# Altium PCB wristband5.PcbDoc
Units mm, origin at the board's own origin, x right, y up, seen from the top; angles counter-clockwise.
Board outline 43 x 44.5 mm, 2 copper layers (Top Layer, Bottom Layer); 15 components, 24 nets, 85 pads, 0 vias.
Unrouted connection lines stored in the file: 42.
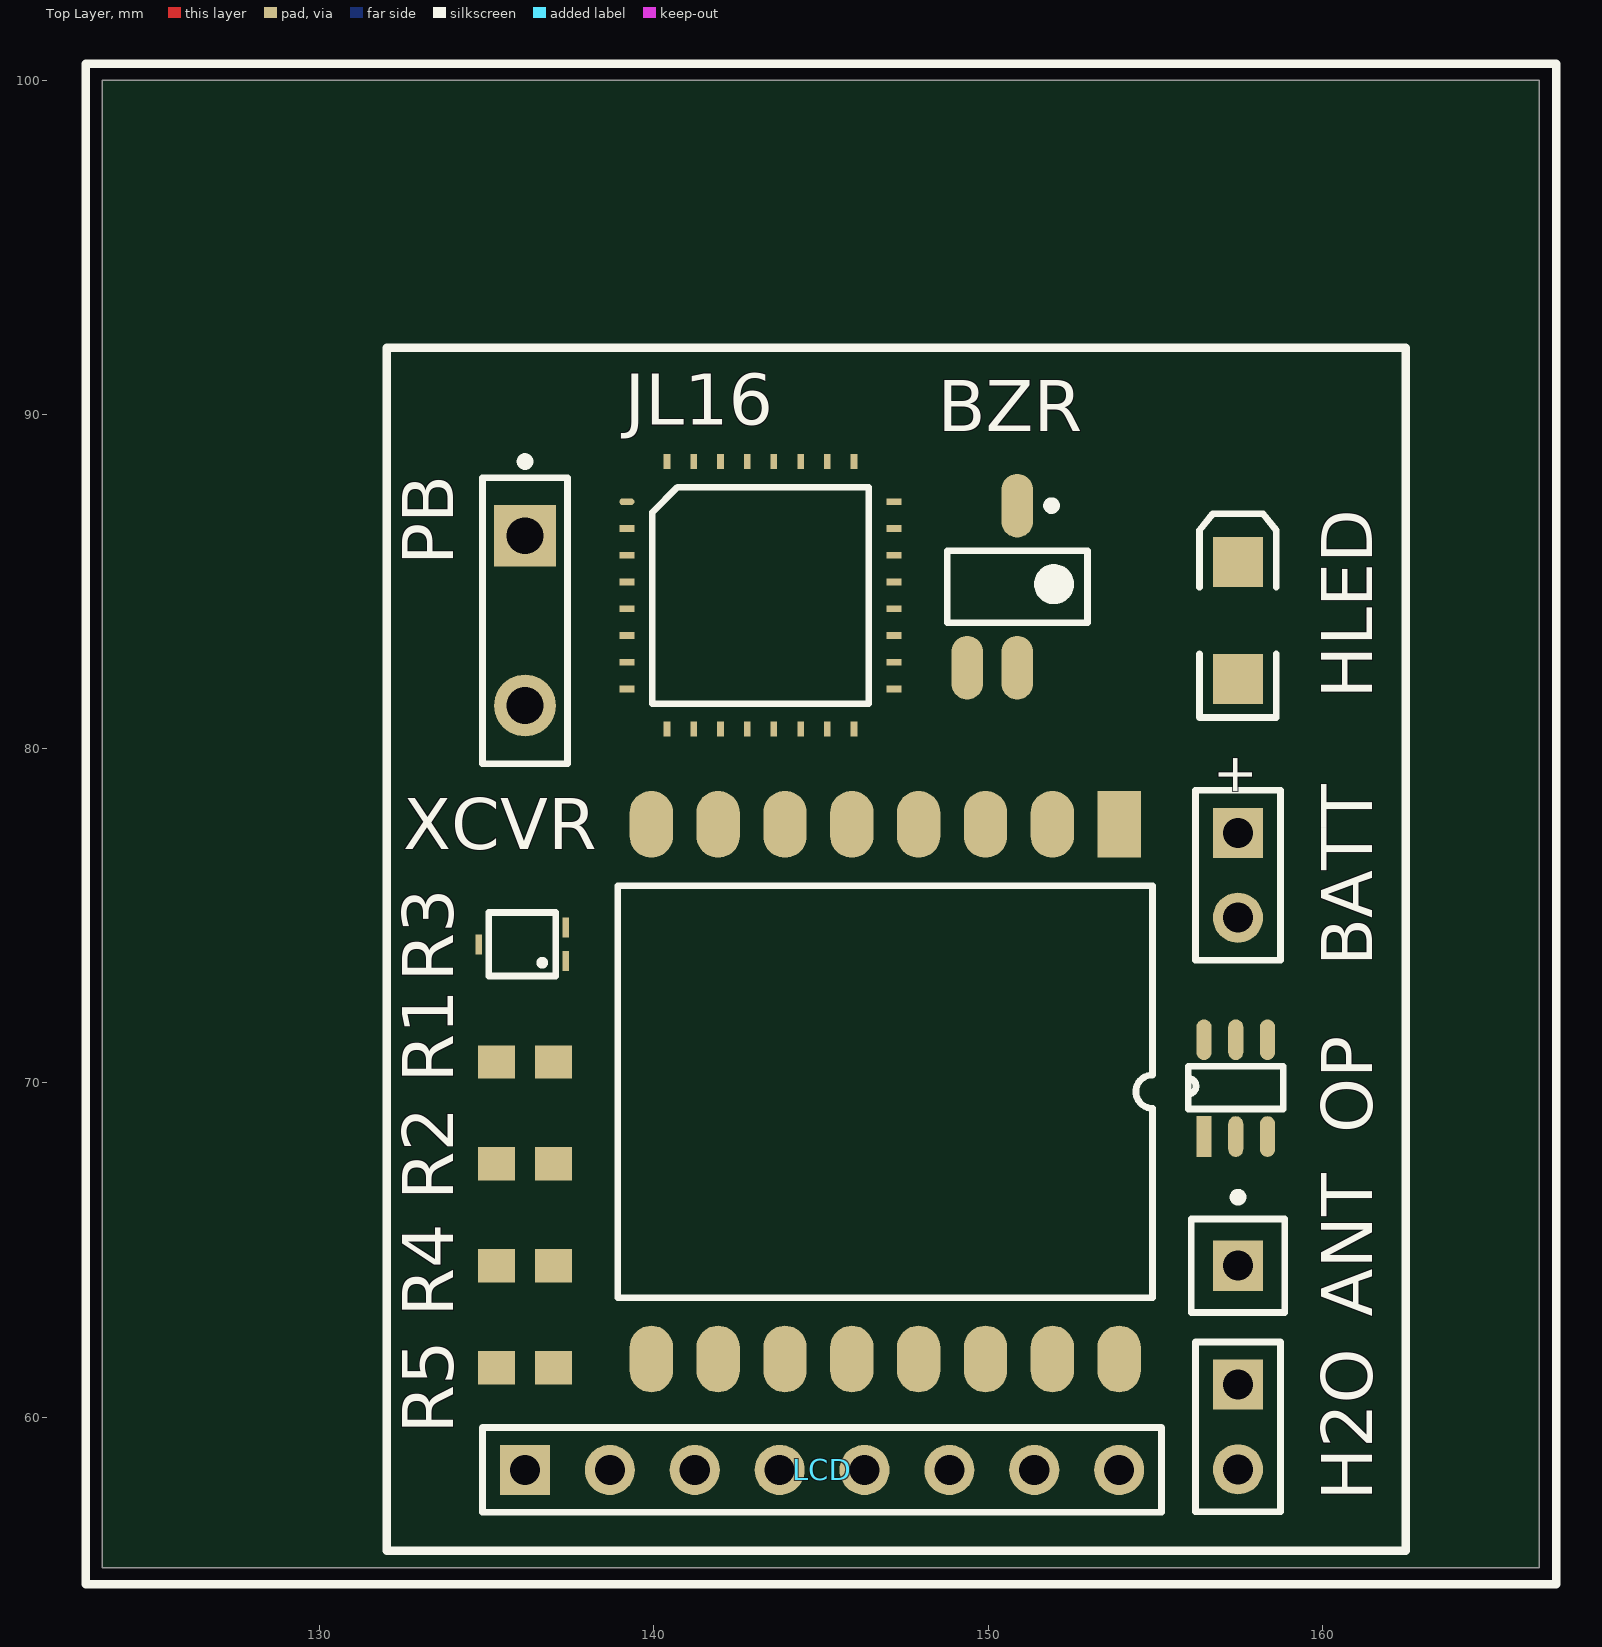
[diagram p0: Top Layer view]
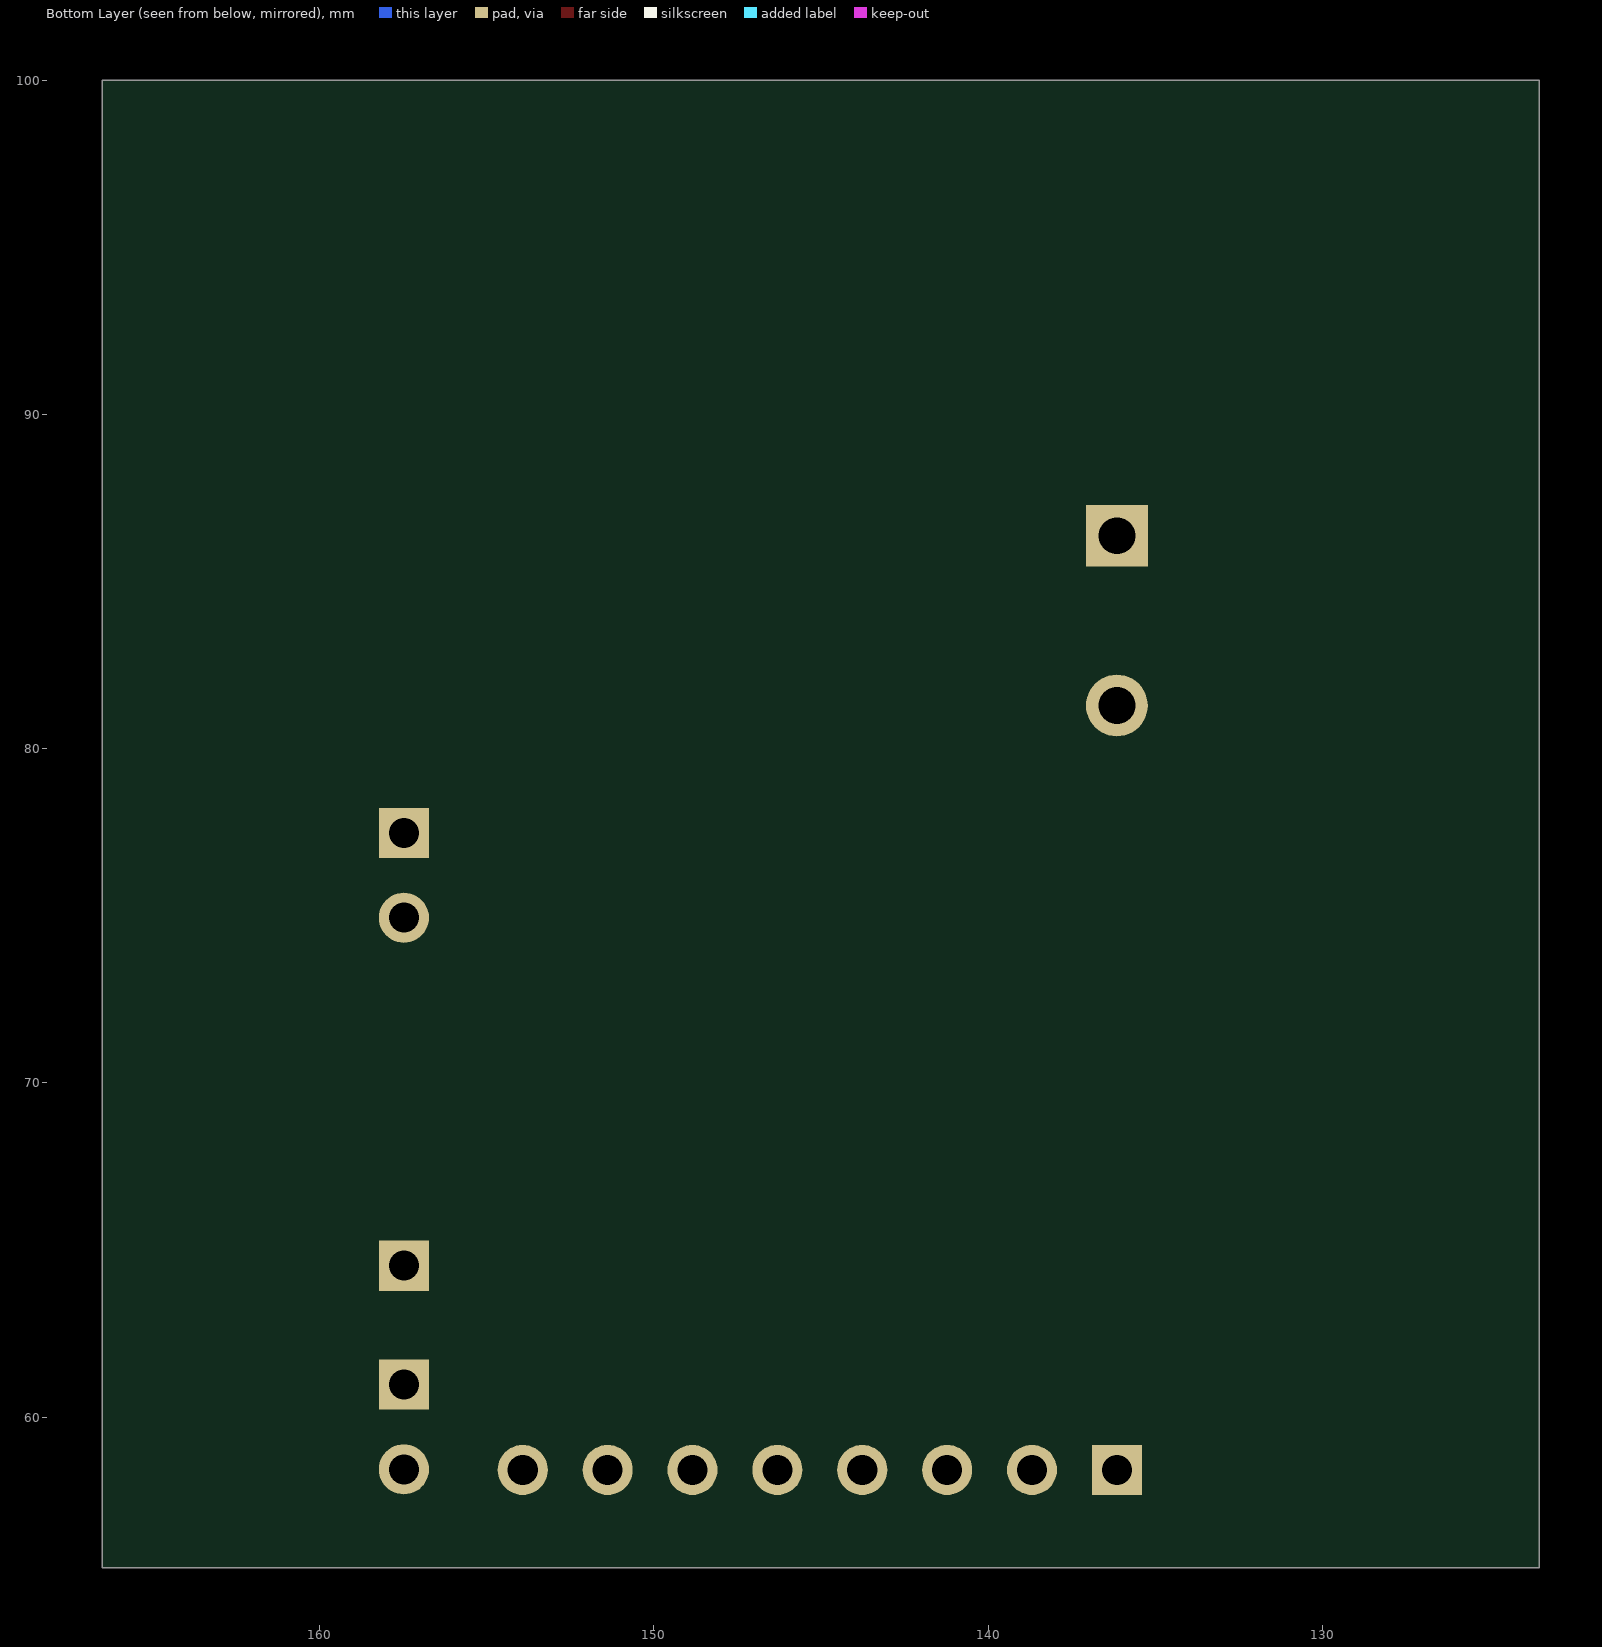
[diagram p1: Bottom Layer view, seen from below]

## Layer stack, top to bottom
Top Layer: signal copper 0.0356
Dielectric: dielectric 0.32, FR-4, Dk 4.8
Bottom Layer: signal copper 0.0356

## Board outline
123.5,100 123.5,55.5 166.5,55.5 166.5,100 123.5,100

## Design rules (kind name [scope] priority, off if disabled: settings)
Clearance [All] p1: gap=0.254
PolygonConnect [All] p1: connectstyle=Relief reliefconductorwidth=0.254 reliefentries=4 polygonreliefangle="90 Angle"
RoutingVias [All] p1: holewidth=0.711 width=1.27 viastyle="Through Hole" minholewidth=0.711 minwidth=1.27 maxholewidth=0.711 maxwidth=1.27
SilkscreenOverComponentPads [All] p1: minsilkscreentomaskgap=0.254
SolderMaskExpansion [All] p1: expansion=0.102
TestPointUsage [All] p1: valid=0 allowmultiple=FALSE
Testpoint [All] p1: side=15 testpointundercomponent=TRUE minsize=1.016 maxsize=2.54 preferedsize=1.524 minholesize=0 maxholesize=1.016 preferedholesize=0.813 testpointgrid=0.025 style=1023 order=0-112345678
Width [All] p1: maxlimit=0.254 minlimit=0.254 preferedwidth=0.254
23 further rules are at their usual default settings.

## Components (designator, comment, footprint, x,y, rotation, side; value= is the part's Value field where it differs from the comment)
ANT "Antenna" PIN1 157.48,64.532 r0 top
BATT "Battery" BAT-2 157.48,76.216 r270 top
BZR "BUZZER" BUZZER_SOJ 150.876,84.852 r270 top
H2O "Header 2" HDR1X2 157.48,60.976 r270 top
HLED "LED2" 3.2X1.6X1.1 157.48,83.836 r90 top
JL16 "JL16" JL16_QUAD32 139.192,87.392 r0 top
LCD "LCD_3D" LCD 136.144,58.42 r0 top
OP "OPAMP" OPAMP_SOP6 156.464,68.596 r90 top
PB "SW-PB" SPST-2 136.144,83.836 r270 top
R1 "Res3" J1-0603 136.144,70.628 r0 top
R2 "Res3" J1-0603 136.144,67.58 r180 top
R3 "RPot" POT 137.16,75.2 r180 top
R4 "Res3" J1-0603 136.144,64.532 r0 top
R5 "Res3" J1-0603 136.144,61.484 r0 top
XCVR "XCVR" XCVR_SOP16 153.924,77.74 r270 top

## Footprints (in the part's own frame and the unit in brackets; to place one, negate y for a bottom-side part, rotate by r counter-clockwise, add the part's x,y. Pads: shape width x height; smd on the part's side, far side on the other; paste and mask are expansions set on the pad)
3.2X1.6X1.1 [mm] "SMT LED; 2 Flat Leads"
  rect 1.5x1.5 smd: 1(-1.75,0) 2(1.75,0)
  silkscreen extent -2.9,-1.15 3.2,1.15
BAT-2 [mm] "Multicell Battery; 2 Leads"
  rect 1.5x1.5 hole 0.9: 1(-1.27,0)
  round 1.5 hole 0.9: 2(1.27,0)
  silkscreen extent -2.54,-1.27 2.54,1.27
BUZZER_SOJ [mm] "SOJ, 3-Leads, Body 4.2x5.5mm (max), Pitch 1.50mm, IPC Low Density"
  oval 1.9x0.95 smd: 1(-2.425,0) 2(2.425,-1.5) 3(2.425,0)
  silkscreen extent -2.55,-2.1 1.07,2.1, body extent -2.75,-2.1 2.75,2.1, height 2.12
HDR1X2 [mm] "Connector; Header; 2 Position"
  rect 1.5x1.5 hole 0.9: 1(0,0)
  round 1.5 hole 0.9: 2(2.54,0)
  silkscreen extent -1.27,-1.27 3.81,1.27
J1-0603 [mm] "Chip Resistor; Body 1.6 x 0.8 mm (LxW typ)"
  rect 1.1x1 smd: 1(-0.85,0) 2(0.85,0)
JL16_QUAD32 [mm]
  oval 0.45x0.2 smd: 1(0,0)
  rect 0.45x0.2 smd: 2(0,-0.8) 3(0,-1.6) 4(0,-2.4) 5(0,-3.2) 6(0,-4) 7(0,-4.8) 8(0,-5.6) 17(8,-5.6) 18(8,-4.8) 19(8,-4) 20(8,-3.2) 21(8,-2.4) 22(8,-1.6) 23(8,-0.8) 24(8,0)
  rect 0.2x0.45 smd: 9(1.2,-6.8) 10(2,-6.8) 11(2.8,-6.8) 12(3.6,-6.8) 13(4.4,-6.8) 14(5.2,-6.8) 15(6,-6.8) 16(6.8,-6.8) 25(6.8,1.2) 26(6,1.2) 27(5.2,1.2) 28(4.4,1.2) 29(3.6,1.2) 30(2.8,1.2) 31(2,1.2) 32(1.2,1.2)
  silkscreen extent 0.76,-6.04 7.24,0.44, body extent 0.3,-6.5 7.7,0.9, height 1.6
LCD [mm] "Connector; Header; 8 Position"
  rect 1.5x1.5 hole 0.9: 1(0,0)
  round 1.5 hole 0.9: 2(2.54,0) 3(5.08,0) 4(7.62,0) 5(10.16,0) 6(12.7,0) 7(15.24,0) 8(17.78,0)
  silkscreen extent -1.27,-1.27 19.05,1.27, body extent -13,-3 31,42, height 3.01
OPAMP_SOP6 [mm]
  rect 1.22x0.45 smd: 1(-0.2,0)
  oval 1.22x0.45 smd: 2(-0.2,-0.95) 3(-0.2,-1.9) 4(2.7,-1.9) 5(2.7,-0.95) 6(2.7,0)
  silkscreen extent 0.62,-2.38 1.9,0.48, body extent 0.5,-2.5 2,0.6, height 1
PIN1 [mm] "Generic Antenna; 1 Lead"
  rect 1.5x1.5 hole 0.9: 1(0,0)
  silkscreen extent -1.4,-1.4 1.4,2.17
POT [mm] "490-2034-2-ND"
  rect 0.2x0.6 smd: 1(-0.2,1.55) 2(-0.2,0.55) 3(2.4,1.05)
  silkscreen extent 0.1,0.09 2.1,2, body extent -0.2,0 2.4,2.1, height 0.8
SPST-2 [mm] "Circuit Breaker; 2 Leads"
  rect 1.85x1.85 hole 1.1: 1(-2.54,0)
  round 1.85 hole 1.1: 2(2.54,0)
  silkscreen extent -4.89,-1.27 4.28,1.27
XCVR_SOP16 [mm]
  rect 2x1.3 smd: 1(0,0)
  oval 2x1.3 smd: 2(0,-2) 3(0,-4) 4(0,-6) 5(0,-8) 6(0,-10) 7(0,-12) 8(0,-14) 9(16,-14) 10(16,-12) 11(16,-10) 12(16,-8) 13(16,-6) 14(16,-4) 15(16,-2) 16(16,0)
  silkscreen extent 1.83,-15 14.17,1, body extent 1,-15 15,1, height 1.8

## Part data
ANT: "Generic Antenna"
BATT: "Multicell Battery"
H2O: "Header, 2-Pin"
HLED: "Typical RED, GREEN, YELLOW, AMBER GaAs LED"
JL16: "Freescale MC908JL16"
OP: "LT6230CS6"
PB: "Switch"
R1 R2 R4 R5: "Resistor"
R3: "Potentiometer"
XCVR: "RFM22B"

## Nets (pads, with @x,y where several pads share a name; then routed paths per layer and width w, separated by ;. In a path a pad name is that pad's centre, name@x,y a point inside that pad or via, vN(x,y) a via of type N, cw(c..) or ccw(c..) an arc to the next point about the centre after c; other vN are vias at no path point)
3.3V: BATT.1 BZR.1 H2O.1 JL16.7 LCD.1 OP.6 R3.2 R4.2 XCVR.11
DC: JL16.18 LCD.5
DN: JL16.17 LCD.6
GND: BATT.2 JL16.3 LCD.2 OP.2 OP.4 OP.5 PB.1 R1.1 R2.1 R2.2 R3.1 XCVR.12
LED: LCD.8 R5.1
NetANT_1: ANT.1 XCVR.14
NetBZR_3: BZR.3 JL16.8
NetH2O_2: H2O.2 R1.2
NetHLED_1: HLED.1 R4.1
NetHLED_2: HLED.2 JL16.6 OP.1
NetJL16_4: JL16.4 XCVR.8
NetJL16_9: JL16.9 PB.2
NetJL16_12: JL16.12 R5.2
NetJL16_13: JL16.13 XCVR.7
NetJL16_14: JL16.14 XCVR.6
NetJL16_16: JL16.16 XCVR.1
NetJL16_19: JL16.19 XCVR.2
NetJL16_22: JL16.22 XCVR.4
NetJL16_24: JL16.24 XCVR.3
NetJL16_26: JL16.26 XCVR.5
NetOP_3: OP.3 R3.3
RST: JL16.20 LCD.4
SCE: JL16.21 LCD.3
SCLK: JL16.15 LCD.7
pads on no net: BZR.2 JL16.1 JL16.2 JL16.5 JL16.10 JL16.11 JL16.23 JL16.25 JL16.27 JL16.28 JL16.29 JL16.30 JL16.31 JL16.32 XCVR.9 XCVR.10 XCVR.13 XCVR.15 XCVR.16

## Silkscreen, mask and mechanical layers (free items; w line width, h text height)
Top Overlay:
  lines w0.254: 123,55 123,100.5 167,100.5 167,55 123,55 ; 132,56 132,92 162.5,92 162.5,56 132,56

## Text inside footprints (layer, text, board x,y; h text height)
BATT: Top Overlay "+" at 156.903,79.886 h1.15 r270